# EAGLE board Backplane (EAGLE 9.6.2)

Size 98 x 98 mm. Coordinates in mm from the lower left corner, seen from the top.
Outline: 0,0 98,0 98,98 0,98 0,0
Copper layers (1*16): Top 0.035mm / dielectric 1.5mm / Bottom 0.035mm
Design rules "default": minimum track width 6mil, minimum drill 0.35mm, track to track 6mil, track to pad 6mil, pad to pad 6mil, via to via 6mil, smd to smd 6mil, copper to edge 40mil, drill to drill 6mil, minimum pad ring 10mil, minimum via ring 8mil, stop-mask expansion 4mil, vias tented up to drill 0mil, thermal gap 10mil

## Footprints (pad centres in the part's own frame; a part is rotated, then mirrored left to right if it is on the bottom)
SSW-116-02-G-S = drill 1 pad 1.5 octagon: 1 -19.05,0; 2 -16.51,0; 3 -13.97,0; 4 -11.43,0; 5 -8.89,0; 6 -6.35,0; 7 -3.81,0; 8 -1.27,0; 9 1.27,0; 10 3.81,0; 11 6.35,0; 12 8.89,0; 13 11.43,0; 14 13.97,0; 15 16.51,0; 16 19.05,0
SSW-116-02-G-S-RA = drill 1 pad 1.5 octagon: 1 -19.05,1.524; 2 -16.51,1.524; 3 -13.97,1.524; 4 -11.43,1.524; 5 -8.89,1.524; 6 -6.35,1.524; 7 -3.81,1.524; 8 -1.27,1.524; 9 1.27,1.524; 10 3.81,1.524; 11 6.35,1.524; 12 8.89,1.524; 13 11.43,1.524; 14 13.97,1.524; 15 16.51,1.524; 16 19.05,1.524
SSW-103-02-G-S = drill 1 pad 1.5 octagon: 1 -2.54,0; 2 0,0; 3 2.54,0
DIL14 = drill 0.813 long: 1 -7.62,-3.81; 2 -5.08,-3.81; 3 -2.54,-3.81; 4 0,-3.81; 5 2.54,-3.81; 6 5.08,-3.81; 7 7.62,-3.81; 8 7.62,3.81; 9 5.08,3.81; 10 2.54,3.81; 11 0,3.81; 12 -2.54,3.81; 13 -5.08,3.81; 14 -7.62,3.81
PCI_INTERFACE = drill 0.7 square: A1 -11.65,1.25 | drill 0.7: A2 -10.65,3.25; A3 -9.65,1.25; A4 -8.65,3.25; A5 -7.65,1.25; A6 -6.65,3.25; A7 -5.65,1.25; A8 -4.65,3.25; A9 -3.65,1.25; A10 -2.65,3.25; A11 -1.65,1.25; A12 1.35,3.25; A13 2.35,1.25; A14 3.35,3.25; A15 4.35,1.25; A16 5.35,3.25; A17 6.35,1.25; A18 7.35,3.25; A19 8.35,1.25; A20 9.35,3.25; A21 10.35,1.25; A22 11.35,3.25; A23 12.35,1.25; A24 13.35,3.25; A25 14.35,1.25; A26 15.35,3.25; A27 16.35,1.25; A28 17.35,3.25; A29 18.35,1.25; A30 19.35,3.25; A31 20.35,1.25; A32 21.35,3.25; B1 -11.65,-1.25; B2 -10.65,-3.25; B3 -9.65,-1.25; B4 -8.65,-3.25; B5 -7.65,-1.25; B6 -6.65,-3.25; B7 -5.65,-1.25; B8 -4.65,-3.25; B9 -3.65,-1.25; B10 -2.65,-3.25; B11 -1.65,-1.25; B12 1.35,-3.25; B13 2.35,-1.25; B14 3.35,-3.25; B15 4.35,-1.25; B16 5.35,-3.25; B17 6.35,-1.25; B18 7.35,-3.25; B19 8.35,-1.25; B20 9.35,-3.25; B21 10.35,-1.25; B22 11.35,-3.25; B23 12.35,-1.25; B24 13.35,-3.25; B25 14.35,-1.25; B26 15.35,-3.25; B27 16.35,-1.25; B28 17.35,-3.25; B29 18.35,-1.25; B30 19.35,-3.25; B31 20.35,-1.25; B32 21.35,-3.25 | hole 2.35: 0,0; 23.15,0

## Placement (x,y rotation side)
ADDR_INCOMING  SSW-116-02-G-S  [SSW-116-02-G-S]  2,25 270 top
ADDR_OUTGOING  SSW-116-02-G-S-RA  [SSW-116-02-G-S-RA]  88.4,25 90 top
CLK_INV  SSW-103-02-G-S  [SSW-103-02-G-S]  10,66 0 top
CLR_INV  SSW-103-02-G-S  [SSW-103-02-G-S]  10,71 0 top
DB_INCOMING  SSW-116-02-G-S  [SSW-116-02-G-S]  2,73 270 top
DB_OUTGOING  SSW-116-02-G-S-RA  [SSW-116-02-G-S-RA]  88.4,73 90 top
IC1  74AC04N  [DIL14]  14,26 270 top
IN_INV  SSW-103-02-G-S  [SSW-103-02-G-S]  10,61 0 top
OUT_INV  SSW-103-02-G-S  [SSW-103-02-G-S]  10,56 0 top
RS_DATA  SSW-116-02-G-S  [SSW-116-02-G-S]  40,48 270 top
U$1  BACKPLATE_INTERFACEHEADER  [PCI_INTERFACE]  31,38 90 top

## Library data of the parts
ADDR_INCOMING DB_INCOMING RS_DATA = con-samtec; MF: Samtec Inc.; MPN: SSW-116-02-G-S; OC_FARNELL: unknown; OC_NEWARK: 29C5896
ADDR_OUTGOING DB_OUTGOING = con-samtec; MF: Samtec Inc.; MPN: SSW-116-02-G-S-RA; OC_FARNELL: unknown; OC_NEWARK: 11P9579
CLK_INV CLR_INV IN_INV OUT_INV = con-samtec; MF: Samtec Inc.; MPN: SSW-103-02-G-S; OC_FARNELL: unknown; OC_NEWARK: 11P9367
IC1 = 74xx-eu
U$1 = Computer

## Nets
ADDR0: ADDR_INCOMING.1 ADDR_OUTGOING.16 U$1.A12
ADDR1: ADDR_INCOMING.2 ADDR_OUTGOING.15 U$1.A13
ADDR2: ADDR_INCOMING.3 ADDR_OUTGOING.14 U$1.A14
ADDR3: ADDR_INCOMING.4 ADDR_OUTGOING.13 U$1.A15
ADDR4: ADDR_INCOMING.5 ADDR_OUTGOING.12 U$1.A16
ADDR5: ADDR_INCOMING.6 ADDR_OUTGOING.11 U$1.A17
ADDR6: ADDR_INCOMING.7 ADDR_OUTGOING.10 U$1.A18
ADDR7: ADDR_INCOMING.8 ADDR_OUTGOING.9 U$1.A19
ADDR8: ADDR_INCOMING.9 ADDR_OUTGOING.8 U$1.A20
ADDR9: ADDR_INCOMING.10 ADDR_OUTGOING.7 U$1.A21
ADDR10: ADDR_INCOMING.11 ADDR_OUTGOING.6 U$1.A22
ADDR11: ADDR_INCOMING.12 ADDR_OUTGOING.5 U$1.A23
ADDR12: ADDR_INCOMING.13 ADDR_OUTGOING.4 U$1.A24
ADDR13: ADDR_INCOMING.14 ADDR_OUTGOING.3 U$1.A25
ADDR14: ADDR_INCOMING.15 ADDR_OUTGOING.2 U$1.A26
ADDR15: ADDR_INCOMING.16 ADDR_OUTGOING.1 U$1.A27
DB0: DB_INCOMING.1 DB_OUTGOING.16 U$1.B12
DB1: DB_INCOMING.2 DB_OUTGOING.15 U$1.B13
DB2: DB_INCOMING.3 DB_OUTGOING.14 U$1.B14
DB3: DB_INCOMING.4 DB_OUTGOING.13 U$1.B15
DB4: DB_INCOMING.5 DB_OUTGOING.12 U$1.B16
DB5: DB_INCOMING.6 DB_OUTGOING.11 U$1.B17
DB6: DB_INCOMING.7 DB_OUTGOING.10 U$1.B18
DB7: DB_INCOMING.8 DB_OUTGOING.9 U$1.B19
DB8: DB_INCOMING.9 DB_OUTGOING.8 U$1.B20
DB9: DB_INCOMING.10 DB_OUTGOING.7 U$1.B21
DB10: DB_INCOMING.11 DB_OUTGOING.6 U$1.B22
DB11: DB_INCOMING.12 DB_OUTGOING.5 U$1.B23
DB12: DB_INCOMING.13 DB_OUTGOING.4 U$1.B24
DB13: DB_INCOMING.14 DB_OUTGOING.3 U$1.B25
DB14: DB_INCOMING.15 DB_OUTGOING.2 U$1.B26
DB15: DB_INCOMING.16 DB_OUTGOING.1 U$1.B27
GND: IC1.7 U$1.B1 U$1.B32
N$1: RS_DATA.1 U$1.A4
N$2: CLR_INV.3 IC1.1
N$3: RS_DATA.2 U$1.A5
N$4: RS_DATA.3 U$1.A6
N$5: RS_DATA.4 U$1.A7
N$6: RS_DATA.5 U$1.A8
N$7: RS_DATA.6 U$1.A9
N$8: CLK_INV.3 IC1.3
N$9: IC1.5 IN_INV.3
N$10: IC1.9 OUT_INV.3
N$11: RS_DATA.7 U$1.A10
N$12: RS_DATA.8 U$1.A11
N$13: RS_DATA.9 U$1.B4
N$14: RS_DATA.10 U$1.B5
N$15: CLR_INV.1 IC1.2
N$16: CLK_INV.1 IC1.4
N$17: IC1.6 IN_INV.1
N$18: IC1.8 OUT_INV.1
N$19: RS_DATA.11 U$1.B6
N$20: RS_DATA.12 U$1.B7
N$21: RS_DATA.13 U$1.B8
N$22: RS_DATA.14 U$1.B9
N$23: RS_DATA.15 U$1.B10
N$24: RS_DATA.16 U$1.B11
N$25: CLR_INV.2 U$1.B28
N$26: CLK_INV.2 U$1.A28
N$27: IN_INV.2 U$1.A3
N$28: OUT_INV.2 U$1.A2
VCC: IC1.14 U$1.A1 U$1.A32

## Tracks (layer width: path | path; a pad name or v marks a point on that pad's centre or on a via)
ADDR0  (2 unrouted)
ADDR1  (2 unrouted)
ADDR2  (2 unrouted)
ADDR3  (2 unrouted)
ADDR4  (2 unrouted)
ADDR5  (2 unrouted)
ADDR6  (2 unrouted)
ADDR7  (2 unrouted)
ADDR8  (2 unrouted)
ADDR9  (2 unrouted)
ADDR10  (2 unrouted)
ADDR11  (2 unrouted)
ADDR12  (2 unrouted)
ADDR13  (2 unrouted)
ADDR14  (2 unrouted)
ADDR15  (2 unrouted)
DB0  (2 unrouted)
DB1  (2 unrouted)
DB2  (2 unrouted)
DB3  (2 unrouted)
DB4  (2 unrouted)
DB5  (2 unrouted)
DB6  (2 unrouted)
DB7  (2 unrouted)
DB8  (2 unrouted)
DB9  (2 unrouted)
DB10  (2 unrouted)
DB11  (2 unrouted)
DB12  (2 unrouted)
DB13  (2 unrouted)
DB14  (2 unrouted)
DB15  (2 unrouted)
GND  (2 unrouted)
N$1  (1 unrouted)
N$2  (1 unrouted)
N$3  (1 unrouted)
N$4  (1 unrouted)
N$5  (1 unrouted)
N$6  (1 unrouted)
N$7  (1 unrouted)
N$8  (1 unrouted)
N$9  (1 unrouted)
N$10  (1 unrouted)
N$11  (1 unrouted)
N$12  (1 unrouted)
N$13  (1 unrouted)
N$14  (1 unrouted)
N$15  (1 unrouted)
N$16  (1 unrouted)
N$17  (1 unrouted)
N$18  (1 unrouted)
N$19  (1 unrouted)
N$20  (1 unrouted)
N$21  (1 unrouted)
N$22  (1 unrouted)
N$23  (1 unrouted)
N$24  (1 unrouted)
N$25  (1 unrouted)
N$26  (1 unrouted)
N$27  (1 unrouted)
N$28  (1 unrouted)
VCC  (2 unrouted)